# EAGLE board trackuino micro sensor (EAGLE 7.1.0)
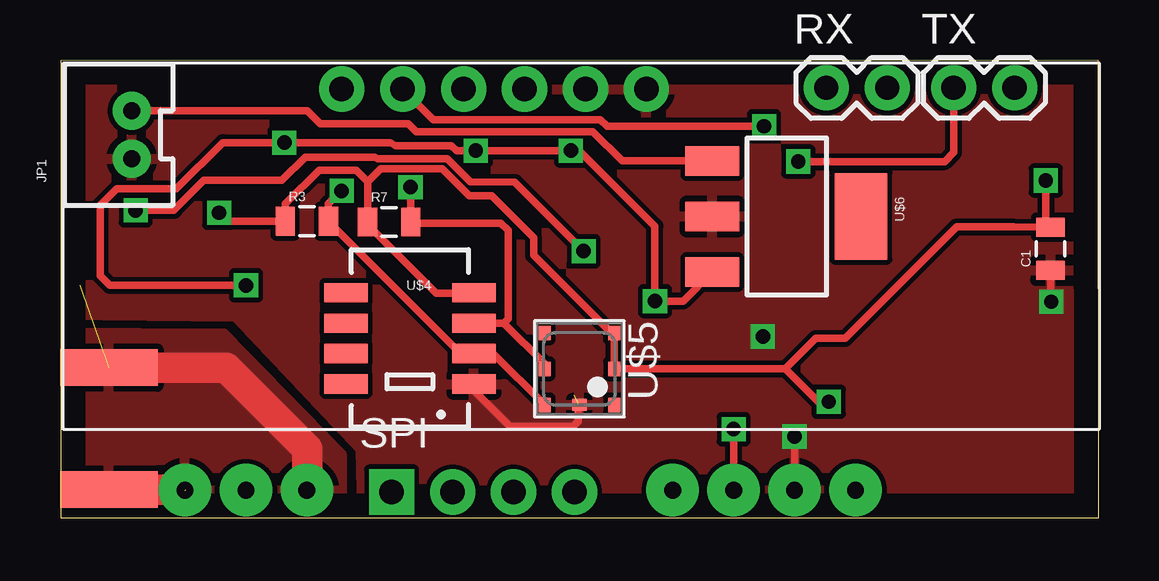
[diagram p0: board, top side]
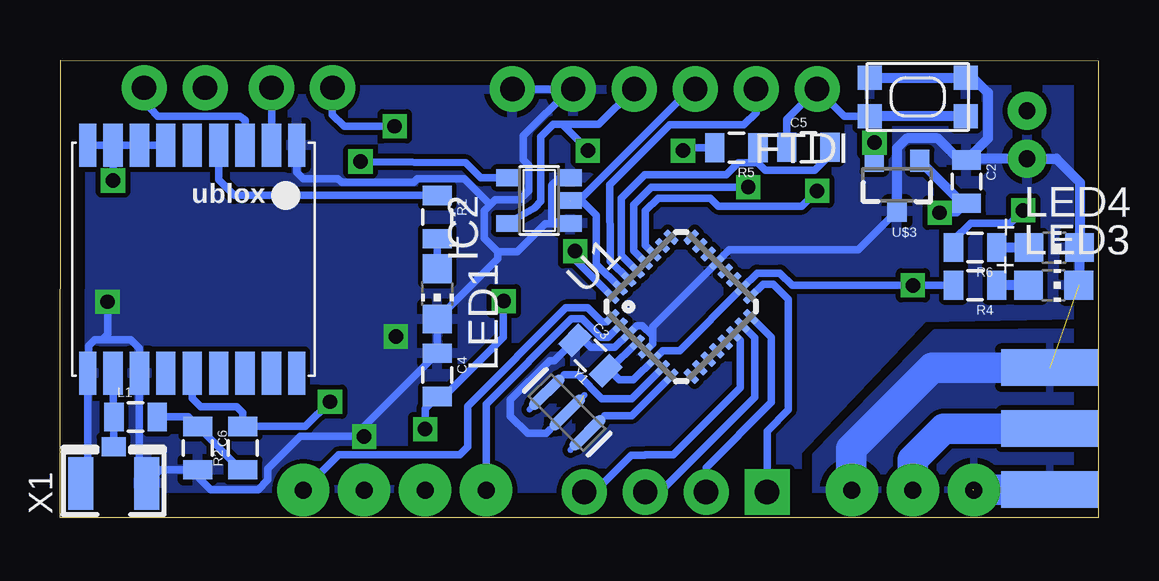
[diagram p1: board, bottom side, seen from below]

Size 43.26 x 19.07 mm. Coordinates in mm from the lower left corner, seen from the top.
Outline: 0,0 43.26,0 43.23,19.07 0,19.04 0,0
Copper layers (1*16): Top 0.035mm / dielectric 1.5mm / Bottom 0.035mm
Design rules "default": minimum track width 10mil, minimum drill 24mil, track to track 8mil, track to pad 8mil, pad to pad 8mil, via to via 8mil, smd to smd 8mil, copper to edge 40mil, drill to drill 8mil, minimum pad ring 10mil, minimum via ring 8mil, stop-mask expansion 4mil, vias tented up to drill 0mil, thermal gap 10mil

## Footprints (pad centres in the part's own frame; a part is rotated, then mirrored left to right if it is on the bottom)
0805 = smd 0.8 x 1.2: 1 -0.9,0; 2 0.9,0
1X06_NO_SILK = drill 1.016 pad 1.88: 1 0,0; 2 2.54,0; 3 5.08,0; 4 7.62,0; 5 10.16,0; 6 12.7,0
SOT23-5 = smd 0.69 x 0.99: 1 -0.95,-1.29; 2 0,-1.29; 3 0.95,-1.29; 4 0.95,1.3; 5 -0.95,1.3
SMA-EDGE = smd 1.524 x 4.064: GND@0 0,0; GND@1 5.08,0; SIG 2.54,0 | smd 1.524 x 4.064 bottom: GND@2 0,0; GND@3 5.08,0
JST-2-PTH-VERT = drill 0.7 pad 1.6: 1 -1,-0.55; 2 1,-0.55
CHIP-LED0805 = smd 1.2 x 1.2: A 0,-1.05; C 0,1.05
1X02 = drill 1.016 pad 1.88: 1 0,0; 2 2.54,0
1X04_NO_SILK = drill 1.016 pad 1.88 square: 1 0,0 | drill 1.016 pad 1.88: 2 2.54,0; 3 5.08,0; 4 7.62,0
KMR2 = smd 1 x 1: 1 2,0.8; 2 2,-0.8; 3 -2,0.8; 4 -2,-0.8
MLF32 = smd 0.7 x 0.3: 1 -2.35,1.75; 2 -2.35,1.25; 3 -2.35,0.75; 4 -2.35,0.25; 5 -2.35,-0.25; 6 -2.35,-0.75; 7 -2.35,-1.25; 8 -2.35,-1.75; 17 2.35,-1.75; 18 2.35,-1.25; 19 2.35,-0.75; 20 2.35,-0.25; 21 2.35,0.25; 22 2.35,0.75; 23 2.35,1.25; 24 2.35,1.75 | smd 0.3 x 0.7: 9 -1.75,-2.35; 10 -1.25,-2.35; 11 -0.75,-2.35; 12 -0.25,-2.35; 13 0.25,-2.35; 14 0.75,-2.35; 15 1.25,-2.35; 16 1.75,-2.35; 25 1.75,2.35; 26 1.25,2.35; 27 0.75,2.35; 28 0.25,2.35; 29 -0.25,2.35; 30 -0.75,2.35; 31 -1.25,2.35; 32 -1.75,2.35
UBLOX_MAX = smd 1.8 x 0.7: 1_GND 4.95,-4.4; 9_V_RESET 4.95,4.3; 10_GND -4.55,4.3; 18_RESERVED -4.55,-4.4 | smd 1.8 x 0.8: 2_TXD1 4.95,-3.35; 3_RXD1 4.95,-2.25; 4_TIMEPULSE 4.95,-1.15; 5_EXTINT0 4.95,-0.05; 6_V_BCKP 4.95,1.05; 7_VCC_IO 4.95,2.15; 8_VCC 4.95,3.25; 11_RF_IN -4.55,3.25; 12_GND -4.55,2.15; 13_ANTON -4.55,1.05; 14_VCC_RF -4.55,-0.05; 15_RESERVED -4.55,-1.15; 16_SDA2 -4.55,-2.25; 17_SCL2 -4.55,-3.35
RADIOMETRIX-HX1 = drill 0.7 pad 2.184: 0V 8.89,-10.16; EN 3.81,-10.16; RFGND -11.43,-10.16; RFGND2 -16.51,-10.16; RFOUT -13.97,-10.16; TXD 11.43,-10.16; VCC 6.35,-10.16
SOT23-3 = smd 0.8 x 0.9: 1 -0.95,-1; 2 0.95,-1; 3 0,1.1
SHT1X = smd 1.8 x 0.8: 1 -2.667,1.905; 2 -2.667,0.635; 3 -2.667,-0.635; 4 -2.667,-1.905; 5 2.667,-1.905; 6 2.667,-0.635; 7 2.667,0.635; 8 2.667,1.905
BMP180 = smd 0.6 x 0.5: 1 1.5,1.45; 2 0,1.45; 3 -1.5,1.45; 4 -1.5,-1.45; 5 0,-1.45; 6 1.5,-1.45 | smd 0.5 x 0.6: 7 1.5,0
SOT223 = smd 1.219 x 2.235: 1 -2.311,-3.099; 2 0,-3.099; 3 2.311,-3.099 | smd 3.6 x 2.2: 4 0,3.099
U.FL = smd 2.2 x 1.05: 1 0,1.375; 2 0,-1.375 | smd 0.8 x 1: 3 1.525,0
RESONATOR-SMD = smd 0.45 x 1.905: 1 -1.2,0; 2 0,0; 3 1.2,0

## Placement (x,y rotation side)
C1  [0805]  41.25,11.2 90 top
C2  [0805]  5.49,14 270 bottom
C3  [0805]  21.16,6.76 315 bottom
C4  [0805]  27.53,5.94 270 bottom
C5  [0805]  12.07,15.43 0 bottom
C6  47pf  [0805]  37.52,2.9 270 bottom
FRAME1  FRAME-LETTER  [CREATIVE_COMMONS]  14.38,-8.15 0 top  (outside the outline)
FTDI  [1X06_NO_SILK]  11.71,17.86 180 bottom
IC2  74AHC1G125DBV  [SOT23-5]  23.29,13.21 90 bottom
J$1  SMA_EDGE  [SMA-EDGE]  2.01,1.17 90 bottom
JP1  M02JST-PTH-VERT  [JST-2-PTH-VERT]  2.41,15.95 90 top
L1  27nh  [0805]  40.11,4.19 0 bottom
LED1  [CHIP-LED0805]  27.53,9.32 180 bottom
LED3  [CHIP-LED0805]  1.85,9.68 270 bottom
LED4  [CHIP-LED0805]  1.83,11.25 270 bottom
R1  [0805]  27.53,12.52 270 bottom
R2  10ohm  [0805]  35.64,2.9 90 bottom
R3  [0805]  10.26,12.34 0 top
R4  [0805]  5.13,9.68 180 bottom
R5  [0805]  15.08,15.41 180 bottom
R6  [0805]  5.13,11.25 180 bottom
R7  [0805]  13.69,12.32 0 top
RX  RX  [1X02]  31.9,17.91 0 top
SPI  [1X04_NO_SILK]  13.79,1.07 0 top
SW1  SPST_TACT-KMR2  [KMR2]  7.52,17.53 180 bottom
TX  TX  [1X02]  37.21,17.91 0 top
U1  ATMEGA168MLF  [MLF32]  17.37,8.79 45 bottom
U$1  UBLOX_MAX  [UBLOX_MAX]  37.8,10.57 90 bottom
U$2  RADIOMETRIX-HX1  [RADIOMETRIX-HX1]  21.69,11.3 0 top
U$3  LM3480IM4  [SOT23-3]  8.38,13.87 180 bottom
U$4  SHT1XSMD  [SHT1X]  14.55,7.47 180 top
U$5  BMP180  [BMP180]  21.62,6.2 270 top
U$6  V_REG_MIC2920  [SOT223]  30.25,12.55 270 top
X1  [U.FL]  41.02,1.42 90 bottom
Y1  16MHZ  [RESONATOR-SMD]  22.13,4.38 315 bottom

## Library data of the parts
C1-C6 = SparkFun-Capacitors
FRAME1 = SparkFun-Aesthetics
FTDI = SparkFun-Connectors; PROD_ID: CONN-08437
IC2 = 74xx-little-us
J$1 JP1 RX SPI TX = SparkFun-Connectors
L1 = SparkFun-Passives
LED1 LED3 LED4 SW1 X1 = adafruit
R1-R7 = SparkFun-Resistors
U1 = SparkFun-DigitalIC
U$1 U$2 = Ava
U$3 U$6 = SparkFun-PowerIC
U$4 U$5 = SparkFun-Sensors
Y1 = SparkFun-FreqCtrl; PROD_ID: XTAL-08900

## Nets
3V: C1.2 C2.2 R2.2 R3.1 R7.1 U$1.6_V_BCKP U$1.7_VCC_IO U$1.8_VCC U$1.9_V_RESET U$1.14_VCC_RF U$3.1 U$4.4 U$5.2 U$5.3
15V: JP1.2 U$6.1
D3: U1.1 U$2.TXD
D4: U1.2 U$2.EN
DTR: C5.1 FTDI.1 SW1.1 SW1.3
GND: C1.1 C2.1 C3.1 C4.1 C6.2 FTDI.5 FTDI.6 IC2.1 IC2.3 J$1.GND@0 J$1.GND@1 J$1.GND@2 J$1.GND@3 JP1.1 LED1.C LED3.C LED4.C SW1.2 SW1.4 U1.3 U1.5 U1.21 U$1.1_GND U$1.10_GND U$1.12_GND U$2.0V U$2.RFGND U$2.RFGND2 U$3.3 U$4.1 U$5.7 U$6.2 X1.1 X1.2 Y1.2
LED: R6.2 U1.32
MISO: SPI.2 U1.16
MOSI: SPI.3 U1.15
N$1: J$1.SIG U$2.RFOUT
N$2: R1.1 U$1.4_TIMEPULSE
N$3: LED1.A R1.2
N$6: L1.1 U$1.11_RF_IN X1.3
N$7: C5.2 R5.1 U1.29
N$8: LED3.A R4.1
N$14: U1.8 Y1.3
N$24: C6.1 L1.2 R2.1
N$26: U1.7 Y1.1
N$27: LED4.A R6.1
RX: TX.2 U$1.3_RXD1
RXO: FTDI.2 RX.1 U1.30
SCK: SPI.1 U1.17
SCL: R7.2 U1.28 U$4.3 U$5.5
SDA: R3.2 U1.27 U$4.2 U$5.6
SS: SPI.4 U1.14
TX: RX.2 U$1.2_TXD1
TX1: IC2.4 TX.1
TXO: FTDI.3 IC2.2 U1.31
VCC: C3.2 C4.2 FTDI.4 IC2.5 R4.2 R5.2 U1.4 U1.6 U1.18 U$2.VCC U$3.2 U$6.3

## Tracks (layer width: path | path; a pad name or v marks a point on that pad's centre or on a via)
3V  (via drill 0.6)
  Top 0.305: v6.6,12.7 6.96,12.34 R3.1 9.36,13.07 10.77,14.48 12.32,14.48 12.8,14 | 12.8,14 12.8,12.33 R7.1 12.79,12.2 15.65,9.35 17.2,9.35 U$4.4 | 12.8,14 13.33,14.53 15.9,14.53 17.02,13.41 17.96,13.41 19.71,11.66 19.71,10.92 22.93,7.7 U$5.3 U$5.2 30.2,6.2 | 30.2,6.2 31.47,7.47 32.69,7.47 37.34,12.12 39.71,12.12 40.71,12.11 | 40.71,12.11 C1.2 | v41.05,14.05 41.05,12.44 40.71,12.11 | v32,4.83 31.57,4.83 30.2,6.2
  Bottom 0.305: U$1.6_V_BCKP U$1.7_VCC_IO U$1.8_VCC | U$1.8_VCC U$1.9_V_RESET | U$1.14_VCC_RF 37.74,4.98 37.39,4.62 35.89,4.62 35.64,4.37 R2.2 33.03,3.8 v32,4.83 | v6.6,12.7 5.88,12.7 C2.2 | U$1.8_VCC v41.04,14.05 v41.05,14.05
  Bottom 0.406: C2.2 5.66,13.1 U$3.1
15V
  Top 0.305: JP1.2 10.28,16.95 10.82,16.41 14.48,16.41 14.81,16.08 22.17,16.08 23.39,14.86 U$6.1
D3
  Bottom 0.305: U1.1 20.48,8.15 20.68,8.15 21.26,8.74 22.17,8.74 26.26,4.65 26.26,2.95 26.59,2.62 31.65,2.62 U$2.TXD
D4
  Bottom 0.305: U1.2 20.41,7.52 20.73,7.52 21.49,8.28 21.95,8.28 25.5,4.72 U$2.EN
DTR
  Bottom 0.305: SW1.1 10.58,16.73 FTDI.1 12.97,16.59 C5.1
  Bottom 0.406: SW1.3 SW1.1
GND  (via drill 0.6)  (3 unrouted)
  Top 0.305: U$4.1 17.22,5.31 18.72,3.81 21.36,3.81 21.56,4.01 21.56,4.65 U$5.7 | C1.1 41.25,9.02 v41.27,8.99 | U$2.0V v30.58,3.38
  Top 1.27: J$1.GND@1 6.91,6.25 10.29,2.87 10.29,1.17 U$2.RFGND | 1.9,1.17 5.21,1.17
  Bottom 0.305: U1.5 18.57,7.24 18.57,7.57 | 18.57,7.57 19,8 19.22,8 U1.3 20.14,7.09 21.13,7.09 21.44,7.39 C3.1 22.66,6.53 22.86,6.53 24.49,4.9 24.49,4.22 23.77,3.51 23,3.51 22.84,3.66 | 18.57,7.57 18.57,7.95 U1.21 15.37,11.15 10,11.15 U$3.3 | X1.1 42.09,1.72 U$1.10_GND 42.06,6.05 42.06,7.16 41.81,7.42 41.5,7.42 | 41.5,7.42 40.31,7.42 39.94,7.05 U$1.12_GND 39.94,1.72 X1.2 39.07,2 C6.2 37.52,1.7 36.98,1.17 35,1.17 34.59,1.57 34.59,2.03 33.25,3.38 v30.58,3.38 30.58,3.8 C4.1 LED1.C 25.02,10.79 25.02,11.07 | FTDI.6 FTDI.5 22,17.86 23.95,15.9 23.95,14.91 23.72,14.68 23.72,13.61 24.1,13.23 25.12,13.23 25.32,13.03 | 25.32,13.03 25.58,12.78 25.58,11.63 25.02,11.07 | 25.02,11.07 24.21,11.07 23.04,12.24 22.55,12.24 | 22.55,12.24 22.02,12.24 IC2.1 | IC2.3 22.44,14.16 22.76,13.84 22.76,12.45 22.55,12.24 | U$1.1_GND 33.39,14.4 33.12,14.12 31.67,14.12 31.52,13.97 28.52,13.97 28.37,14.12 26.42,14.12 25.32,13.03 | v41.27,8.99 41.27,7.65 41.5,7.42
  Bottom 0.406: SW1.2 SW1.4 5.22,18.33 4.6,17.7 4.6,15.78 C2.1 | LED3.C 0.78,9.7 LED4.C 0.76,11.27 0.76,13.97 1.74,14.95 JP1.1 5.43,14.95 C2.1 | C2.1 5.78,14.9 6.68,15.8 7.98,15.8 8.38,15.39 U$3.3
  Bottom 1.27: U$2.RFGND2 5.16,1.17 J$1.GND@2 | J$1.GND@1 6.91,6.25 10.29,2.87 10.29,1.17 U$2.RFGND
  other vias: 29.26,7.54
  pour Top: -0.13,19.05 43.33,18.97 43.33,-0.51 12.6,-0.48 12.5,2.82 7.29,8.36 -0.1,8.43
  pour Bottom: -0.15,19.05 43.33,19 43.31,-0.53 12.7,-0.48 12.55,-0.33 12.55,2.79 7.29,8.36 -0.2,8.48
  pour Top: -0.1,7.72 6.81,7.67 11.71,2.64 11.71,-0.48 -0.1,-0.36
  pour Bottom: -0.1,7.75 6.78,7.7 11.76,2.59 11.76,-0.46 0,-0.43
LED  (via drill 0.6)
  Top 0.305: v3.12,12.8 4.72,12.8 5.97,14.05 9.22,14.05 10.19,15.01 13.08,15.01 13.21,14.96 16.1,14.96 17.07,14 18.92,13.97 v21.79,11.1
  Bottom 0.305: R6.2 6.03,11.55 5.31,12.27 3.66,12.27 v3.12,12.8 | v21.79,11.1 21.79,10.73 U1.32
MISO
  Bottom 0.305: U1.16 13.61,7.5 13.61,4.8 16.33,2.08 SPI.2
MOSI
  Bottom 0.305: U1.15 14.3,7.48 14.3,5 18.24,1.07 SPI.3
N$1
  Bottom 1.27: J$1.SIG 6.43,3.71 7.72,2.41 U$2.RFOUT
N$2
  Bottom 0.305: R1.1 36,13.42 36.65,14.07 U$1.4_TIMEPULSE
N$3
  Bottom 0.305: R1.2 LED1.A
N$6
  Bottom 0.305: U$1.11_RF_IN 41.04,4.31 L1.1 41.01,2.96 X1.3
N$7
  Bottom 0.305: C5.2 11.17,15.12 11.81,14.48 13.87,14.48 14.17,14.78 | 14.17,14.78 R5.1 | 14.17,14.78 14.99,14.78 15.49,14.27 18.9,14.27 19.86,13.31 19.86,10.92 U1.29
N$8
  Bottom 0.406: LED3.A R4.1
N$14
  Bottom 0.305: U1.8 19.44,4.25 20.56,4.25
N$24
  Bottom 0.305: R2.1 35.72,2 C6.1 37.91,4.19 L1.2
N$26
  Bottom 0.305: U1.7 19.44,4.95 20.68,4.95 21.67,5.95 22.26,5.95
N$27
  Bottom 0.406: LED4.A R6.1
RX
  Bottom 0.305: U$1.3_RXD1 35.54,16.55 35.76,16.71 39.19,16.71 39.75,17.32 TX.2
RXO  (via drill 0.6)
  Top 0.305: v29.31,16.31 22.78,16.31 22.48,16.59 15.52,16.59 FTDI.2
  Bottom 0.305: U1.30 20.32,10.67 20.35,13.87 17.86,16.36 14.76,16.36 14.25,16.87 FTDI.2 | RX.1 31.9,16.79 31.42,16.31 v29.31,16.31
SCK
  Bottom 0.305: U1.17 13.96,9.73 13.54,9.73 12.9,9.09 12.9,4.5 13.79,3.61 SPI.1
SCL  (via drill 0.6)
  Top 0.305: v14.58,13.77 14.59,13.27 R7.2 14.64,12.27 18.34,12.27 18.64,11.96 18.64,8.28 18.47,8.1 | U$4.3 18.47,8.1 | U$5.5 20.17,6.4 18.47,8.1
  Bottom 0.305: U1.28 19.35,11.12 19.35,13.03 18.62,13.77 v14.58,13.77
SDA  (via drill 0.6)
  Top 0.305: v11.71,13.61 11.68,13.61 11.15,13.08 11.15,12.36 R3.2 16.67,6.83 U$4.2 18.03,6.83 U$5.6
  Bottom 0.305: U1.27 18.87,11.35 18.87,12.78 18.34,13.31 16.15,13.31 15.82,12.98 12.34,12.98 v11.71,13.61
SS
  Bottom 0.305: U1.14 14.91,7.39 14.91,5.41 17.7,2.62 18.87,2.62 18.9,2.59 19.46,2.59 20.98,1.07 SPI.4
TX
  Bottom 0.305: RX.2 U$1.2_TXD1
TX1  (via drill 0.6)
  Top 0.305: v30.73,14.83 36.83,14.83 37.21,15.21 TX.1
  Bottom 0.305: IC2.4 25.71,14.16 26.34,14.78 30.72,14.82 v30.73,14.83
TXO
  Bottom 0.305: FTDI.3 16.99,17.86 21.51,13.34 | 21.51,13.34 21.87,13.34 IC2.2 | U1.31 20.9,10.55 20.9,12.6 21.51,13.21 21.51,13.34
VCC  (via drill 0.6)
  Top 0.305: v7.72,9.68 2.06,9.68 1.65,10.08 1.65,13 2.34,13.69 4.83,13.69 6.76,15.62 v9.32,15.62 13.74,15.62 13.97,15.49 16.28,15.49 16.51,15.29 v17.3,15.29 v21.26,15.29 21.62,15.29 24.76,12.14 v24.76,9.02 25.93,9.02 U$6.3 | U$2.VCC v28.04,3.68
  Bottom 0.305: U1.4 20.34,6.17 C3.2 20.37,6.15 19.96,5.74 19.36,5.74 U1.6 18.14,6.96 17.43,6.96 U1.18 14.21,10.19 13.26,10.19 12.75,9.68 v7.72,9.68 R4.2 | IC2.5 23.48,12.92 23.22,13.18 23.22,15.88 22.71,16.38 22.33,16.38 | 22.33,16.38 20.8,16.38 FTDI.4 | v9.32,15.62 9.32,14.88 U$3.2 | R5.2 17.05,15.41 v17.3,15.29 | v21.26,15.29 21.49,15.54 22.33,16.38 | v28.04,3.68 28.04,4.54 C4.2 27.26,5.04 24.79,7.52 24.79,8.99 v24.76,9.02